# Altium PCB EDR - Water Meter.PcbDoc (part 2 of 2)
Units mm, origin at the board's own origin, x right, y up, seen from the top; angles counter-clockwise.
Board outline 78 x 60 mm, 2 copper layers (Top Layer, Bottom Layer), stack 1.571 mm thick; 60 components, 41 nets, 194 pads, 54 vias.
Unrouted connection lines stored in the file: 1.
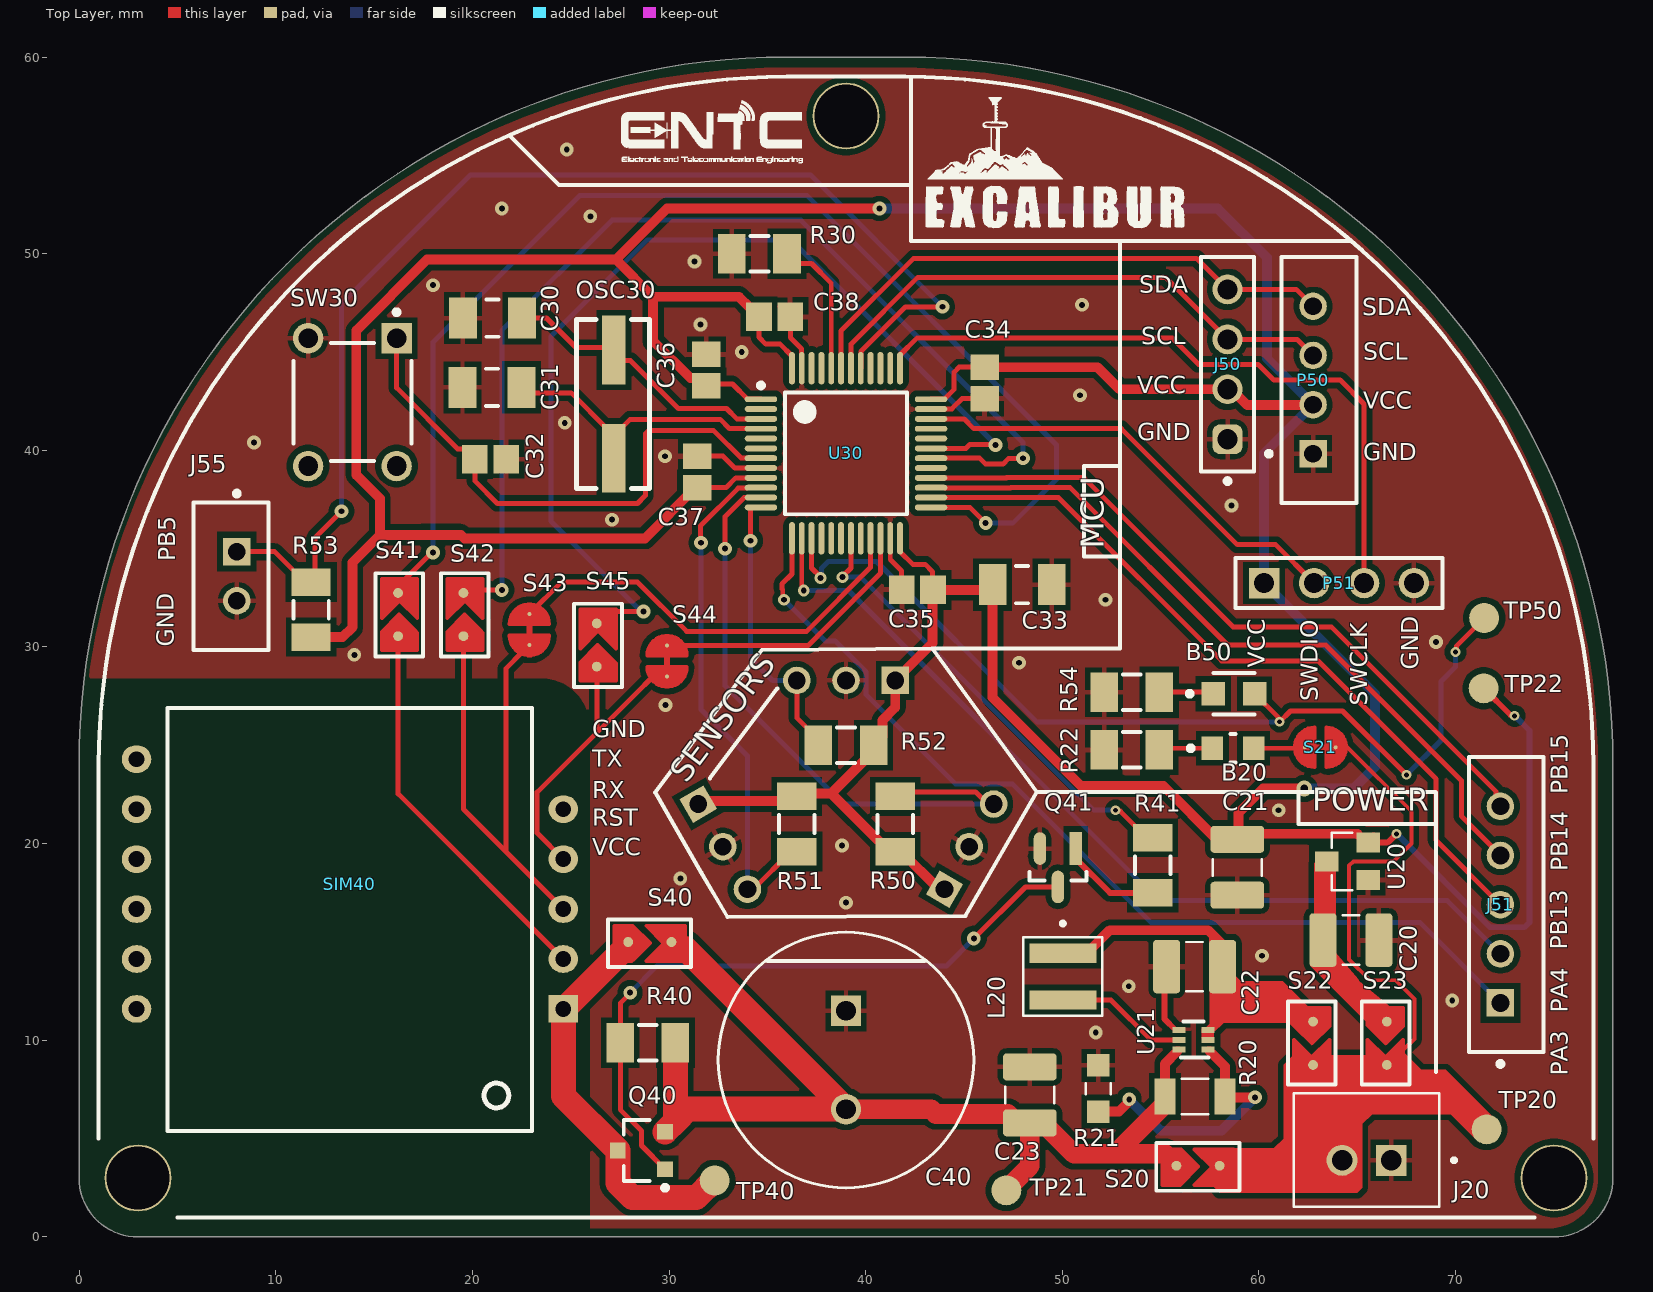
[diagram p0: Top Layer view]

## Via types
v1: diameter 0.7, hole 0.3, Top Layer to Bottom Layer, tented both sides, 43 vias
v2: diameter 0.5, hole 0.25, Top Layer to Bottom Layer, tented both sides, 6 vias
v3: diameter 0.6, hole 0.3, Top Layer to Bottom Layer, tented both sides, 4 vias
v4: diameter 0.8, hole 0.4, Top Layer to Bottom Layer, tented both sides, 1 vias

## Nets (pads, with @x,y where several pads share a name; then routed paths per layer and width w, separated by ;. In a path a pad name is that pad's centre, name@x,y a point inside that pad or via, vN(x,y) a via of type N, cw(c..) or ccw(c..) an arc to the next point about the centre after c; other vN are vias at no path point) (continued)
+3V3: (continued)
  Bottom Layer w0.5: v1(40.7,52.3) 57.9,52.3 60.4,49.8 60.4,44.675 P50.2 60.26,39.835 P51.1 65.9,27.61 65.9,23.9 64.8,22.8 v4(62.3,22.8)
+4V: C23.2 C40.2 Q40.2 R20.2 R40.1 S20.2 S40.1 TP21.1 U21.6 | length 54.6
  Top Layer w0.3: U21.6@55.837,9.425 U21.6 U21.6
  Top Layer w0.5: S40.1 30.45,14.675 ; R20.2 55.222,8.81 U21.6@55.837,9.425
  Top Layer w1: C40.2 43.325,6.5 43.575,6.25 47.229,6.25 47.675,5.804 C23.2 ; TP21.1 47.15,2.419 48.35,3.619 C23.2 ; R20.2 55.222,6.77 52.677,4.225 ; S20.2 55.2,4.225 52.677,4.225 ; C23.2 49.025,5.804 50.604,4.225 52.677,4.225
  Top Layer w1.27: Q40.2 30.325,5.875 ; R40.1 30.325,5.875 ; 30.45,14.675 30.825,14.675 C40.2 30.95,6.5 30.325,5.875
BOOT0: R30.1 U30.44 | length 6.7
  Top Layer w0.254: R30.1@36.275,49.5 37.25,49.5 38.25,48.5 U30.44
GND: C20.1 C21.1 C22.1 C23.1 C30.2 C31.1 C32.1 C33.1 C34.1 C35.1 C36.1 C37.1 C38.1 C40.1 J20.1 J50.1 J52.2 J53.2 J54.2 J55.2 P50.1 P51.4 Q41.2 R21.1 R22.1 R30.2 R54.1 SIM40.5 SW30.3 U20.1 U21.4 U30.8 U30.23 U30.35 U30.47 | length 18.9
  Top Layer w0.254: C37.1 32.75,39.7 33.35,39.1 U30.8 ; C38.1@35.652,47.323 C38.1 36.175,45.725 36.741,45.159 36.741,44.184 U30.47 ; U30.23 41.25,34.45 41.825,33.875 C35.1 ; U30.35 43.334,42.109 44.384,42.109 44.9,42.625 C34.1 ; J52.2 J52.2@45.539,19.85 ; C23.1@48.255,8.646 C23.1 ; Q41.2@48.688,19.364 48.86,19.537 Q41.2 ; R21.1@51.746,8.646 R21.1 ; R22.1@52.125,24.475 R22.1 ; R54.1 R54.1@52.125,28 ; C22.1@55.2,13.646 C22.1 ; U21.4@55.727,10.548 55.75,10.525 U21.4 ; C21.1@58.225,17.379 C21.1 ; J50.1@58.365,40.6 J50.1
  Top Layer w0.3: C22.1@55.2,13.646 55.2,11.075 U21.4@55.75,10.525
  other v1: 51.7,10.4 69.825,12.025 53.375,12.75 60.15,14.3 39,17 30.575,18.225 38.8,19.9 61,21.7 29.825,27.05 47.8,29.2 14,29.6 69,30.25 52.2,32.4 27.1,36.473 58.6,37.2 29.8,39.7 8.9,40.4 24.7,41.4 50.9,42.8 33.7,45 31.6,46.4 51,47.4 18,48.4 31.3,49.6 26,51.9 21.5,52.3 24.8,55.3
I2C1_SCL: J50.3 P50.3 U30.42 | length 27.8
  Top Layer w0.254: U30.42 39.25,45.4 42.65,48.8 55.245,48.8 J50.3 61.93,45.645 P50.3
I2C1_SDA: J50.4 P50.4 U30.43 | length 28.4
  Top Layer w0.254: U30.43 38.75,46.075 42.437,49.762 56.823,49.762 J50.4 61.89,48.185 P50.4
NetB20_1: B20.1 R22.2 | length 2.7
  Top Layer w0.25: R22.2 55,24.85 B20.1
NetB50_1: B50.1 R54.2 | length 2.8
  Top Layer w0.254: R54.2 57.6,27.7 B50.1
NetB50_2: B50.2 TP50.1 U30.15 | length 49.2
  Top Layer w0.254: U30.15 37.25,34.015 37.7,33.565 v3(37.7,33.502) ; B50.2 61.003,26.397 61.003,26.247 v2(61.05,26.2) 61.6,26.75 64.25,26.75 v2(67.5,23.5) ; v2(70,29.75) 70.047,29.797 70.047,30.06 71.45,31.462 TP50.1
  Bottom Layer w0.254: v3(37.7,33.502) 37.766,33.568 37.766,34.016 38.1,34.35 40.55,34.35 48.725,26.175 61.025,26.175 v2(61.05,26.2) ; v2(67.5,23.5) 69.25,25.25 69.25,28.25 69.992,28.992 69.992,29.742 v2(70,29.75)
NetJ51_1: J51.1 U30.13 | length 49
  Top Layer w0.254: v3(35.85,32.4) 35.784,32.466 35.784,32.915 35.745,32.954 35.745,33.208 36.25,33.713 U30.13
  Bottom Layer w0.254: v3(35.85,32.4) 37.943,30.307 38.446,30.307 40.027,28.725 40.027,27.573 44.558,23.042 47.458,23.042 54.5,16 68.175,16 J51.1
NetJ51_2: J51.2 U30.14 | length 45.8
  Top Layer w0.254: U30.14 36.75,33.096 36.85,32.996 v3(36.85,32.875)
  Bottom Layer w0.254: v3(36.85,32.875) 39.125,32.875 54.9,17.1 69.575,17.1 J51.2
NetJ52_3: J52.3 R50.1 U30.11 | length 32.3
  Top Layer w0.254: v1(32.85,35) 32.85,36.625 33.817,37.591 34.666,37.591 U30.11 ; R50.1 41.725,22.625 45.591,22.625 46.201,22.015 J52.3
  Bottom Layer w0.254: v1(32.85,35) 32.85,28.025 38.86,22.015 J52.3
NetJ53_3: J53.3 R51.1 U30.10 | length 26.6
  Top Layer w0.254: v1(31.625,35.3) 31.6,35.325 31.6,36.158 33.519,38.077 33.965,38.077 33.988,38.1 U30.10 ; J53.3 34.285,17.685 36.2,19.6 R51.1
  Bottom Layer w0.254: v1(31.625,35.3) 31.625,26.825 33.99,24.46 J53.3
NetJ54_3: J54.3 R52.1 U30.12 | length 14.8
  Top Layer w0.254: v1(34.15,35.4) 34.15,37.079 34.171,37.1 U30.12 ; J54.3 36.5,26.4 37.6,25.3 R52.1
  Bottom Layer w0.254: v1(34.15,35.4) 34.15,29.413 35.263,28.3 J54.3
NetJ55_1: J55.1 R53.1 U30.41 | length 61.2
  Top Layer w0.254: J55.1 9.95,34.85 11.5,33.3 R53.1 12,33.5 12,35.55 v1(13.35,36.9) ; U30.41 39.759,44.184 39.759,45.033 42.025,47.3 v1(43.9,47.3)
  Bottom Layer w0.254: v1(13.35,36.9) 13.35,47.45 19.9,54 37.2,54 v1(43.9,47.3)
NetL20_2: L20.2 U21.5 | length 6.8
  Top Layer w0.254: L20.2 52.47,12.055 54.5,10.025 U21.5
NetP51_2: P51.2 U30.34 | length 22.9
  Top Layer w0.254: U30.34 45,41.6 45.5,41.1 53,41.1 58.9,35.2 60.85,35.2 P51.2
NetP51_3: P51.3 U30.37 | length 35.1
  Top Layer w0.254: U30.37 41.75,44.85 42.6,45.7 55.6,45.7 56.925,44.375 59.95,44.375 60.75,43.575 64.125,43.575 65.34,42.36 P51.3
NetQ40_1: Q40.1 Q41.3 R40.2 | length 34.1
  Top Layer w0.254: v1(28.025,12.425) 28.025,12.391 27.525,11.891 R40.2 27.525,6.475 28.6,5.4 28.6,4.65 Q40.1 ; v1(45.5,15.175) 48.125,17.8 Q41.3
  Bottom Layer w0.254: v1(28.025,12.425) 29.381,13.781 44.106,13.781 v1(45.5,15.175)
NetQ40_3: Q40.3 S40.2 SIM40.1 TP40.1 | length 20.3
  Top Layer w1.27: SIM40.1 24.625,7.175 Q40.3 27.4,2.744 28.144,2 31.381,2 32.256,2.875 TP40.1 ; SIM40.1@24.675,11.595 27.925,14.845 S40.2
NetQ41_1: Q41.1 R41.2 | length 5.1
  Top Layer w0.3: Q41.1 50.69,19.237 52.427,17.5 R41.2
NetR20_1: R20.1 R21.2 U21.1 | length 14.4
  Top Layer w0.3: U21.1 U21.1@57.515,9.425
  Top Layer w0.5: R21.2 52.875,6.375 53.362,6.862 53.362,6.962 v1(53.4,7) ; U21.1@57.515,9.425 58.278,8.662 58.278,6.82 58.558,7.1 v1(59.8,7.1)
  Bottom Layer w0.5: v1(53.4,7) 55,5.4 58.1,5.4 v1(59.8,7.1)
NetR41_1: R41.1 U30.19 | length 23.4
  Top Layer w0.254: v3(38.825,33.55) 38.825,33.592 39.25,34.017 U30.19 ; v2(52.7,21.7) 52.747,21.653 52.947,21.653 54.3,20.3 R41.1
  Bottom Layer w0.254: v3(38.825,33.55) 39.75,33.55 51.6,21.7 v2(52.7,21.7)
NetS41_1: S41.1 U30.25 | length 62.2
  Top Layer w0.254: 16.476,33.348 17.928,34.8 v1(18,34.8) ; U30.25 45.3,37.1 v1(46.1,36.3)
  Bottom Layer w0.254: v1(18,34.8) 18,45.5 25.45,52.95 37.025,52.95 49.7,40.275 49.7,38.525 47.475,36.3 v1(46.1,36.3)
NetS41_2: S41.2 SIM40.2 | length 19.9
  Top Layer w0.254: S41.2 16.225,22.535 SIM40.2
NetS42_1: S42.1 U30.30 | length 54.4
  Top Layer w0.254: S42.1 20.38,32.75 20.53,32.9 v1(21.5,32.9) ; U30.30 45.8,39.6 46.1,39.3 46.979,39.3 47.269,39.59 47.99,39.59 v1(48,39.6)
  Bottom Layer w0.254: v1(21.5,32.9) 21.5,46.1 27.1,51.7 36.7,51.7 48,40.4 v1(48,39.6)
NetS42_2: S42.2 S43.2 SIM40.3 | length 26.5
  Top Layer w0.2: 22.579,29.779 22.598,29.798
  Top Layer w0.254: S42.2 19.55,21.75 21.7,19.6 ; 22.579,29.779 21.7,28.9 21.7,19.6 ; SIM40.3 21.7,19.6
NetS43_1: S43.1 U30.21 | length 23.5
  Top Layer w0.254: S43.1 22.9,31.675 24.525,33.3 28.4,33.3 30.9,30.8 37,30.8 40.25,34.05 U30.21
NetS44_1: S44.1 U30.22 | length 15.7
  Top Layer w0.254: S44.1 29.9,30.075 37.075,30.075 40.75,33.75 U30.22
NetS44_2: S44.2 S45.2 SIM40.4 | length 16.5
  Top Layer w0.2: 25.5,28.3 25.95,28.75 26.075,28.75 ; S45.2 26.075,28.75 ; 26.35,28.7 26.299,28.75 26.075,28.75 ; 29.006,28.325 29.15,28.325
  Top Layer w0.254: 23.3,22.594 23.3,20.54 SIM40.4 ; 23.3,22.619 28.456,27.775 29.006,28.325 ; 26.35,25.705 26.35,28.7
NetS45_1: S45.1 U30.31 | length 51
  Top Layer w0.254: S45.1 26.925,31.8 v1(28.7,31.8) ; U30.31 45.1,40.1 45.3,40.3 46.573,40.3 v1(46.6,40.273)
  Bottom Layer w0.254: v1(28.7,31.8) 28.6,31.8 24,36.4 24,45.8 28.9,50.7 36.2,50.7 46.6,40.3 v1(46.6,40.273)
NRST: C32.2 SW30.1 U30.7 | length 28.1
  Top Layer w0.254: SW30.1 16.15,43.175 19.247,40.078 19.602,40.078 20.125,39.555 20.125,38.45 21.275,37.3 28.4,37.3 28.8,37.7 28.8,40.851 28.949,41 32.275,41 33.666,39.609 34.666,39.609 U30.7
OSC32_IN: C30.1 OSC30.2 U30.3 | length 14.3
  Top Layer w0.254: C30.1 23.775,46.725 25.275,45.225 OSC30.2@27.2,45.225 ; OSC30.2 27.2,45.041 27.673,44.568 28.032,44.568 30.475,42.125 32.925,42.125 33.45,41.6 U30.3
OSC32_OUT: C31.2 OSC30.1 U30.4 | length 13.4
  Top Layer w0.254: C31.2@22.5,42.925 25.025,42.925 26.9,41.05 27.5,41.05 28.025,41.575 32.6,41.575 33.075,41.1 U30.4
PB13: J51.3 U30.26 | length 39.4
  Top Layer w0.254: U30.26 49.2,37.6 49.8,37.6 58.1,29.3 63,29.3 69,23.3 69,20.175 J51.3
PB14: J51.4 U30.27 | length 37.8
  Top Layer w0.254: U30.27 44.012,38.1 44.021,38.091 44.236,38.091 44.241,38.096 47.374,38.096 47.382,38.104 50.396,38.104 58.4,30.1 63.4,30.1 70.3,23.2 70.3,21.4 72.275,19.425 J51.4
PB15: J51.5 U30.28 | length 36.2
  Top Layer w0.254: U30.28 47.165,38.6 47.173,38.608 51.092,38.608 58.675,31.025 63.675,31.025 72.056,22.644 72.056,22.119 J51.5
S21_out: B20.2 S21.2 | length 2.6
  Top Layer w0.25: B20.2 62.275,24.85 S21.2
S22_out: C22.2 L20.1 S22.2 U21.2 U21.3 | length 17.6
  Top Layer w0.2: C22.2 58.4,13.496 58.4,13.2 58.4,12.3 61.125,12.3 61.775,11.65
  Top Layer w0.254: L20.1 L20.1@51.235,14.425 ; U21.2 U21.3 ; 61.775,11.65 62.05,11.65 S22.2
  Top Layer w0.5: L20.1@51.235,14.425 52.41,15.6 57.416,15.6 57.709,15.307 57.709,15.153 57.711,15.151 57.711,14.078 58.072,13.717 58.207,13.411 C22.2@58.3,13.2
S23_out: C20.2 S23.2 U20.3 | length 4.1
  Top Layer w0.25: C20.2 63.254,18.914 U20.3
VCC: J20.2 S20.1 S21.1 S22.1 S23.1 TP20.1 | length 22.2
  Top Layer w0.2: S21.1 64.5,24.9 67.75,21.65 67.75,20 66.849,19.099 64.799,19.099 64.583,18.883 64.583,14.117 65.645,13.055 66.945,13.055 67.9,12.1 67.9,10.075 67.325,9.5
pads on no net: SIM40.6 SIM40.7 SIM40.8 SIM40.9 SIM40.10 SIM40.11 SW30.2 SW30.4 U30.2 U30.5 U30.6 U30.16 U30.17 U30.18 U30.20 U30.29 U30.32 U30.33 U30.38 U30.39 U30.40 U30.45 U30.46

## Polygon pours and split planes (outlines as drawn)
GND on Bottom Layer "NONET_L-01_P-001" (solid, pour order 2): 0.508,24.542 cw(c35.998,24) 36,59.496 42,59.496 cw(c41.979,23.979) 77.497,24 77.497,3 cw(c74.983,3.003) 74.75,0.5 3.5,0.5 cw(c3.192,3.31) 0.366,3.386 ccw(c-4847.209,56.208) 0.508,18.508 ccw(c-99.05,21.525)
GND on Top Layer "NONET_L-01_P-001" (solid, pour order 3): 0.253,22.627 cw(c35.724,23.95) 35.725,59.446 41.725,59.446 cw(c41.704,23.929) 77.222,23.95 77.222,2.95 cw(c74.708,2.953) 74.475,0.45 3.225,0.45 cw(c2.917,3.26) 0.091,3.336 ccw(c-2513.648,71.177) 0.323,12.563 ccw(c-165.731,16.434)

## Other copper
Top Layer:
  region net VCC: 69.75,6.25 71,5 72,6 69.5,8.5 68,8.5 68,6.5 67.75,6.25
  pour cut-out: 0.26,28.408 23.46,28.408 cw(c23.46,25.868) 26,25.868 26,0 0,0 0,28.148 cw(c0.26,28.148)
  region net S22_out: 57.9,15.45 58.5,14.85 58.5,14.8 57.909,14.8 57.709,15 57.9,15.191
  region net S23_out: 62.8,16.054 62.8,19 62.899,19.099 63.701,19.099 63.9,18.9 63.9,15.8
  region net S23_out: 65.471,10.929 63.4,13 62.6,13.8 62.6,14.5 63.858,14.5 65.039,13.097 65.1,13 67.283,11.192 67.144,10.871
  region net S22_out: 61.775,10.65 61.225,11.2 61.762,11.2 61.775,11.212
  region: 61.775,10.65 61.225,11.2
  region net S22_out: 57.5,12.5 57.5,10.85 57.25,10.6 57.1,10.6 57.1,10.1 57.7,10.1 57.7,10.4 58.2,10.9 62.7,10.9 62.75,10.95 62.675,11.025 62.675,11.65 62.55,11.65 61.2,13 59.075,13 58.325,13.75
  region net VCC: 57.5,2.75 58,2.25 65,2.25 65.25,2.5 65.25,5.75 65.75,6.25 68,6.25 68.25,6.5 68.25,8.5 67.25,9.5 66.75,9 66,9 65.75,9.25 63.25,9.25 62.75,8.75 62,8.75 62,8.85 61.75,9.1 61.75,9.25 61.25,8.75 61.25,8.25 61.25,5 60.75,4.5 58.25,4.5 58.25,3.5

## Silkscreen, mask and mechanical layers (free items; w line width, h text height)
Top Overlay:
  drawing of 150 lines, arcs and shapes, not listed
  text "SDA" at 53.9,47.7 h1.5
  text "SDA" at 65.25,46.575 h1.5
  text "SCL" at 54,45.1 h1.5
  text "SCL" at 65.3,44.3 h1.5
  text "VCC" at 53.8,42.6 h1.5
  text "VCC" at 65.3,41.8 h1.5
  text "GND" at 53.8,40.2 h1.5
  text "GND" at 65.3,39.2 h1.5
  text "MCU" at 52.5,35 h2 r90
  text "PB5" at 5.2,34.35 h1.5 r90
  text "GND" at 5.125,30 h1.5 r90
  text "VCC" at 60.6,28.95 h1.5 r90
  text "GND" at 68.4,28.85 h1.5 r90
  text "SWDIO" at 63.3,27.25 h1.5 r90
  text "SWCLK" at 65.8,27 h1.5 r90
  text "GND" at 26.1,25.1 h1.5
  text "TX" at 26.1,23.6 h1.5
  text "SENSORS" at 31.172,22.791 h2 r53
  text "PB15" at 76,22.5 h1.5 r90
  text "RX" at 26.1,22 h1.5
  text "POWER" at 62.7,21.3 h2
  text "RST" at 26.1,20.6 h1.5
  text "VCC" at 26.101,19.1 h1.5
  text "PB14" at 76,18.6 h1.5 r90
  text "PB13" at 75.983,14.6 h1.5 r90
  text "PA4" at 76,11.4 h1.5 r90
  text "PA3" at 76,8.2 h1.5 r90
Bottom Overlay:
  text "EDR Project - Smart Water Meter" at 31.15,6.45 h0.9
  text "Height - .Board_Height" at 31.15,4.85 h0.9
  text "Width  - .Board_Width" at 31.15,3.25 h0.9
Mechanical 1:
  the board outline again, w1